# Altium PCB CAN Logger 3c HP3561 PCB.PcbDoc (part 1 of 3)
Units mil, origin at the board's own origin, x right, y up, seen from the top; angles counter-clockwise.
Board outline 2229 x 3254 mil, 4 copper layers (Component Side, Signal Layer 2, Signal Layer 1, Solder Side), stack 33.234 mil thick; 117 components, 130 nets, 581 pads, 372 vias.
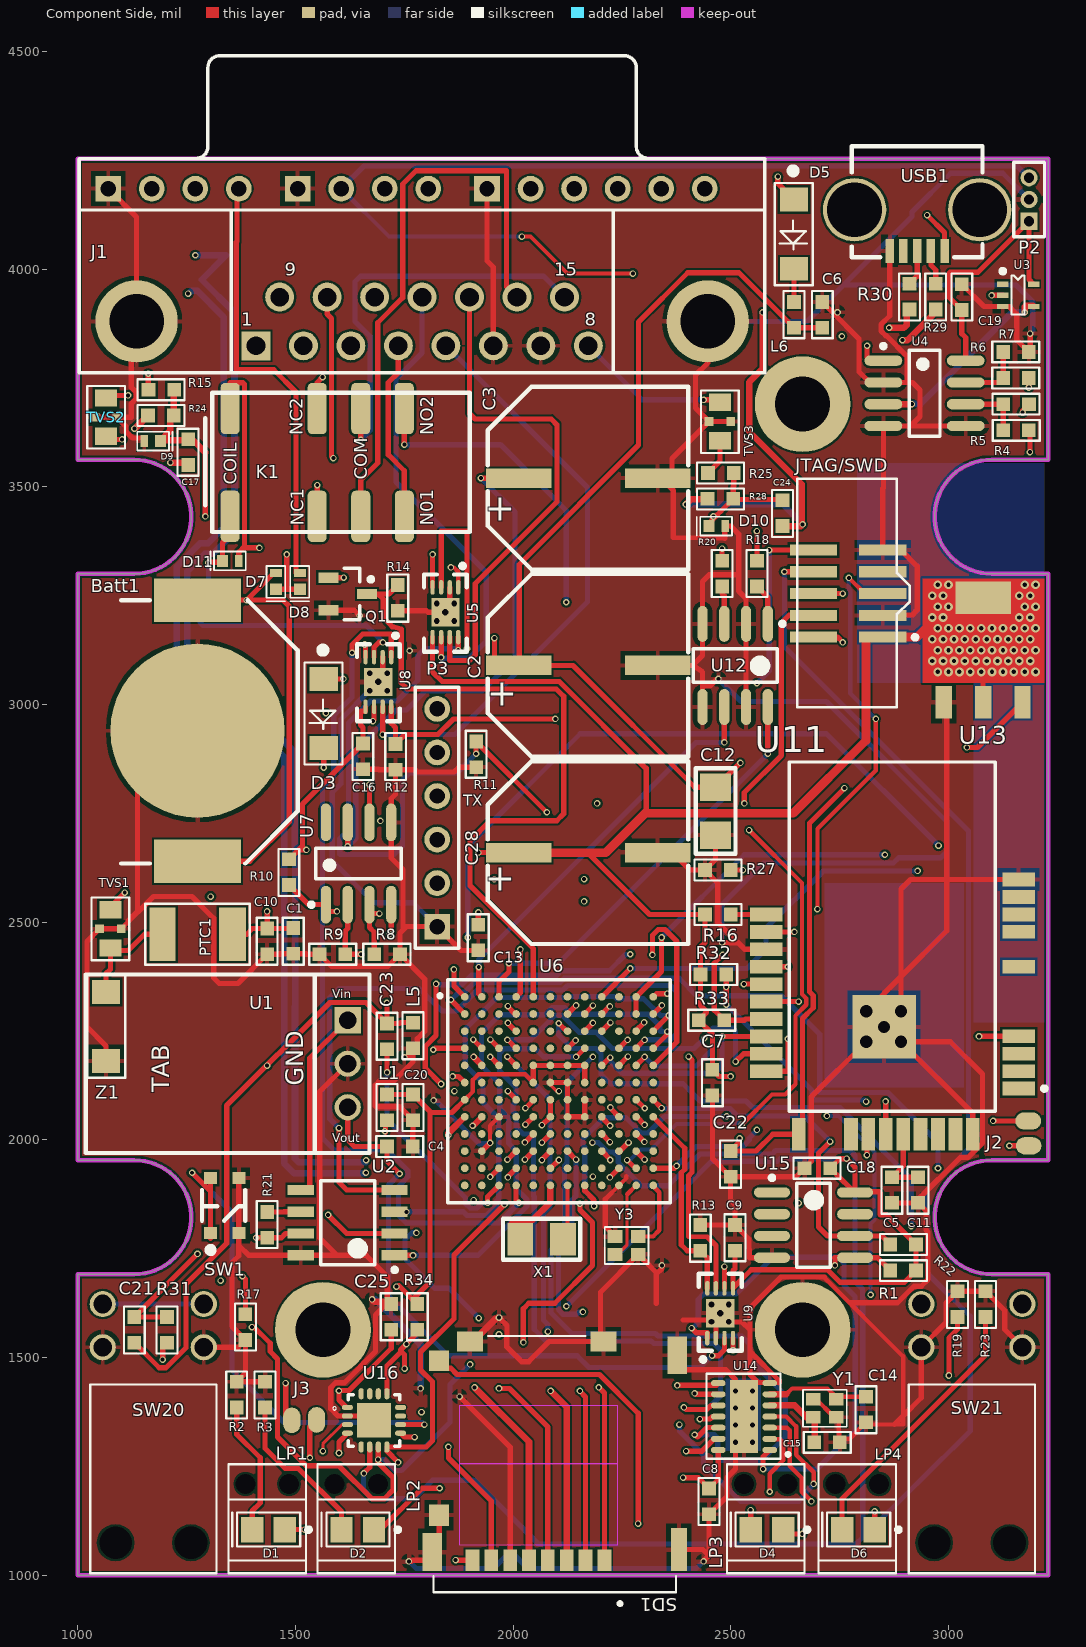
[diagram p0: Component Side view]
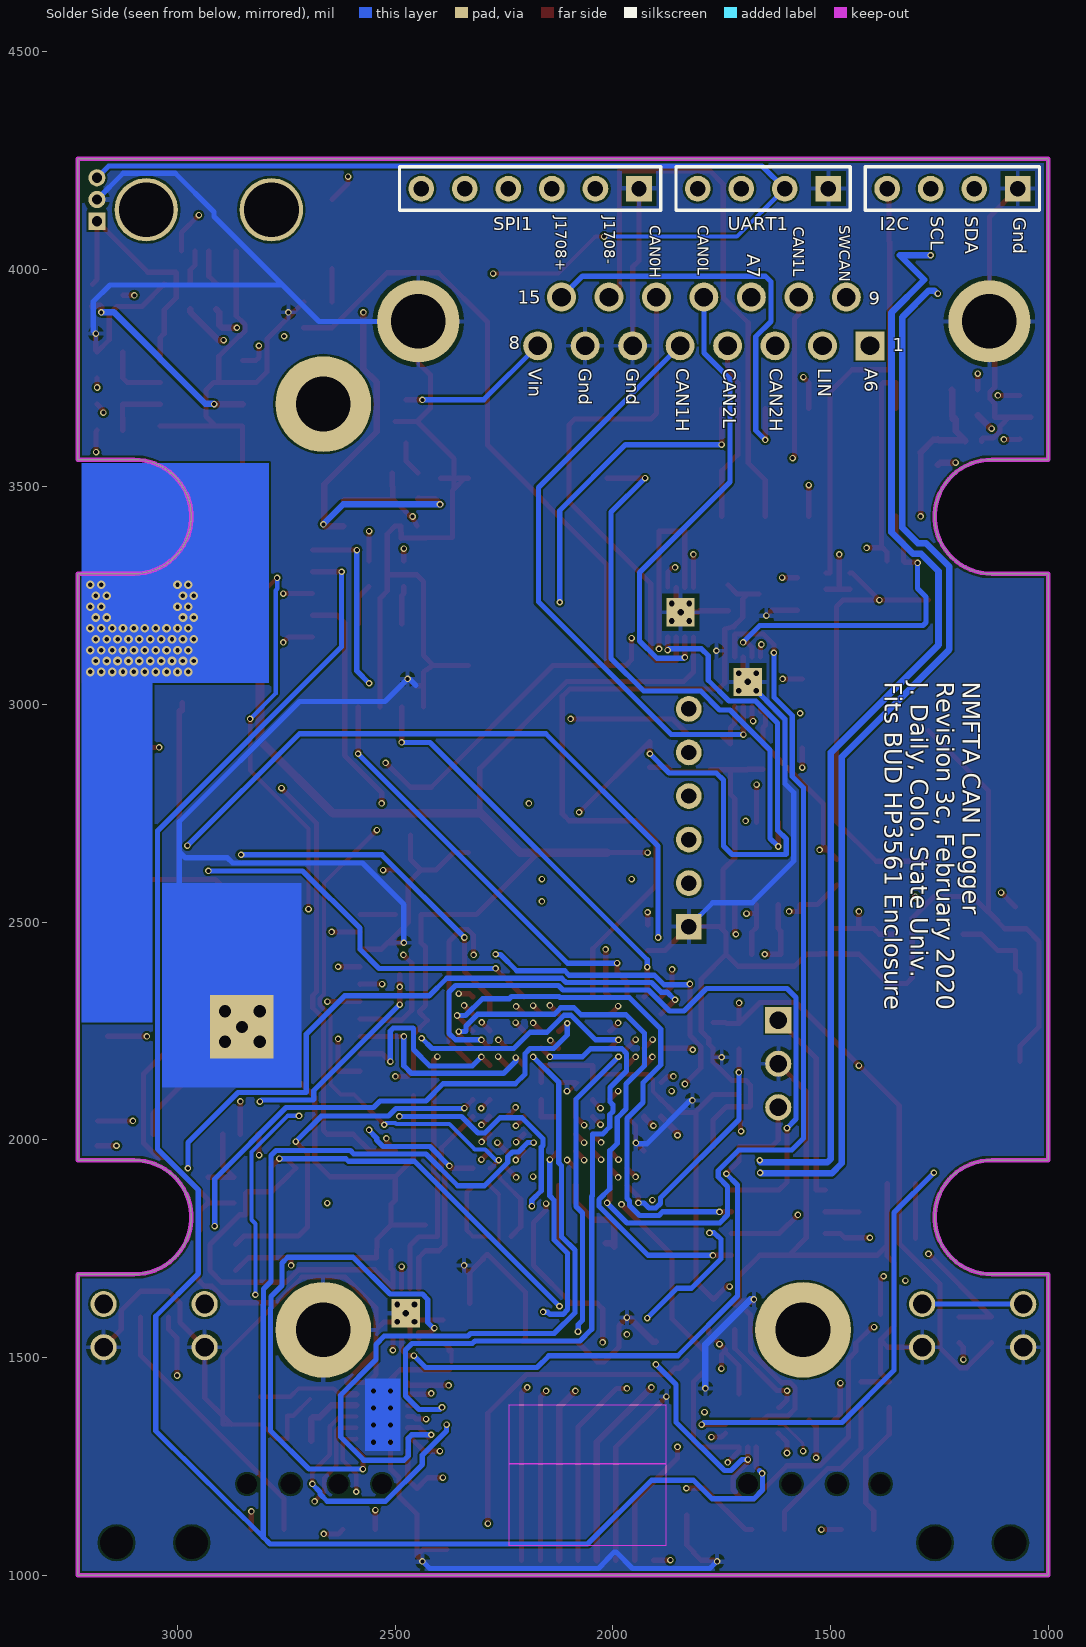
[diagram p1: Solder Side view, seen from below]
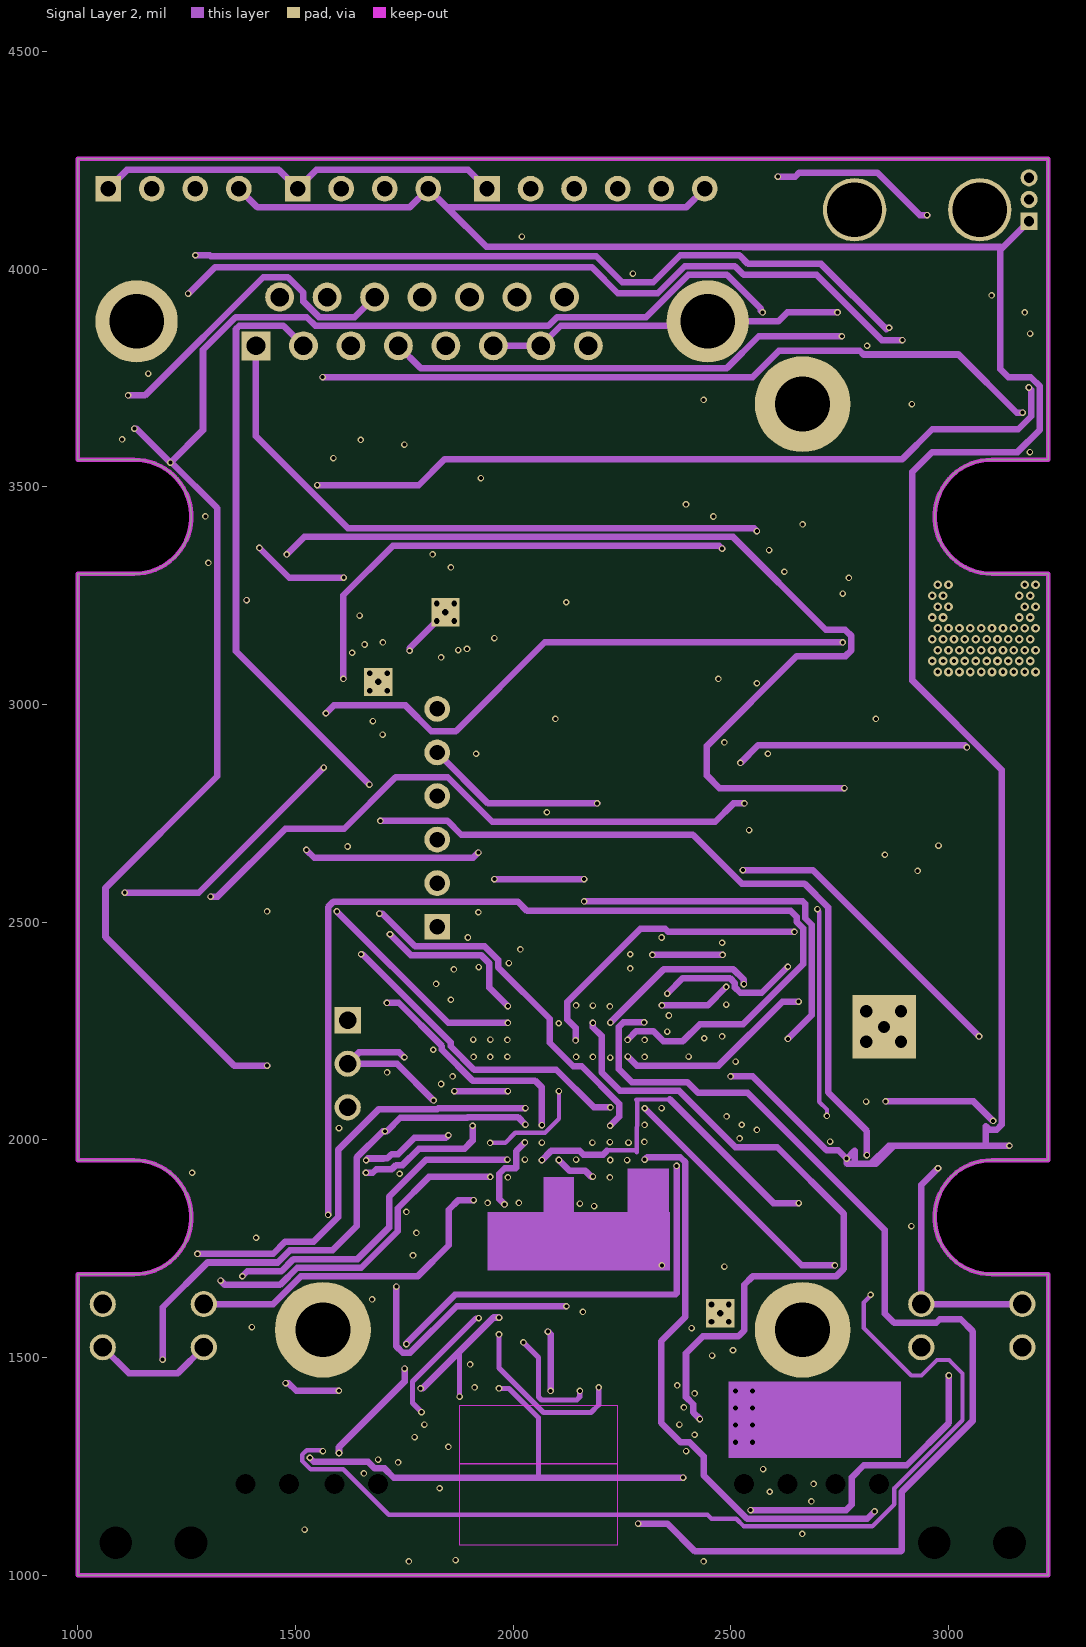
[diagram p2: Signal Layer 2]
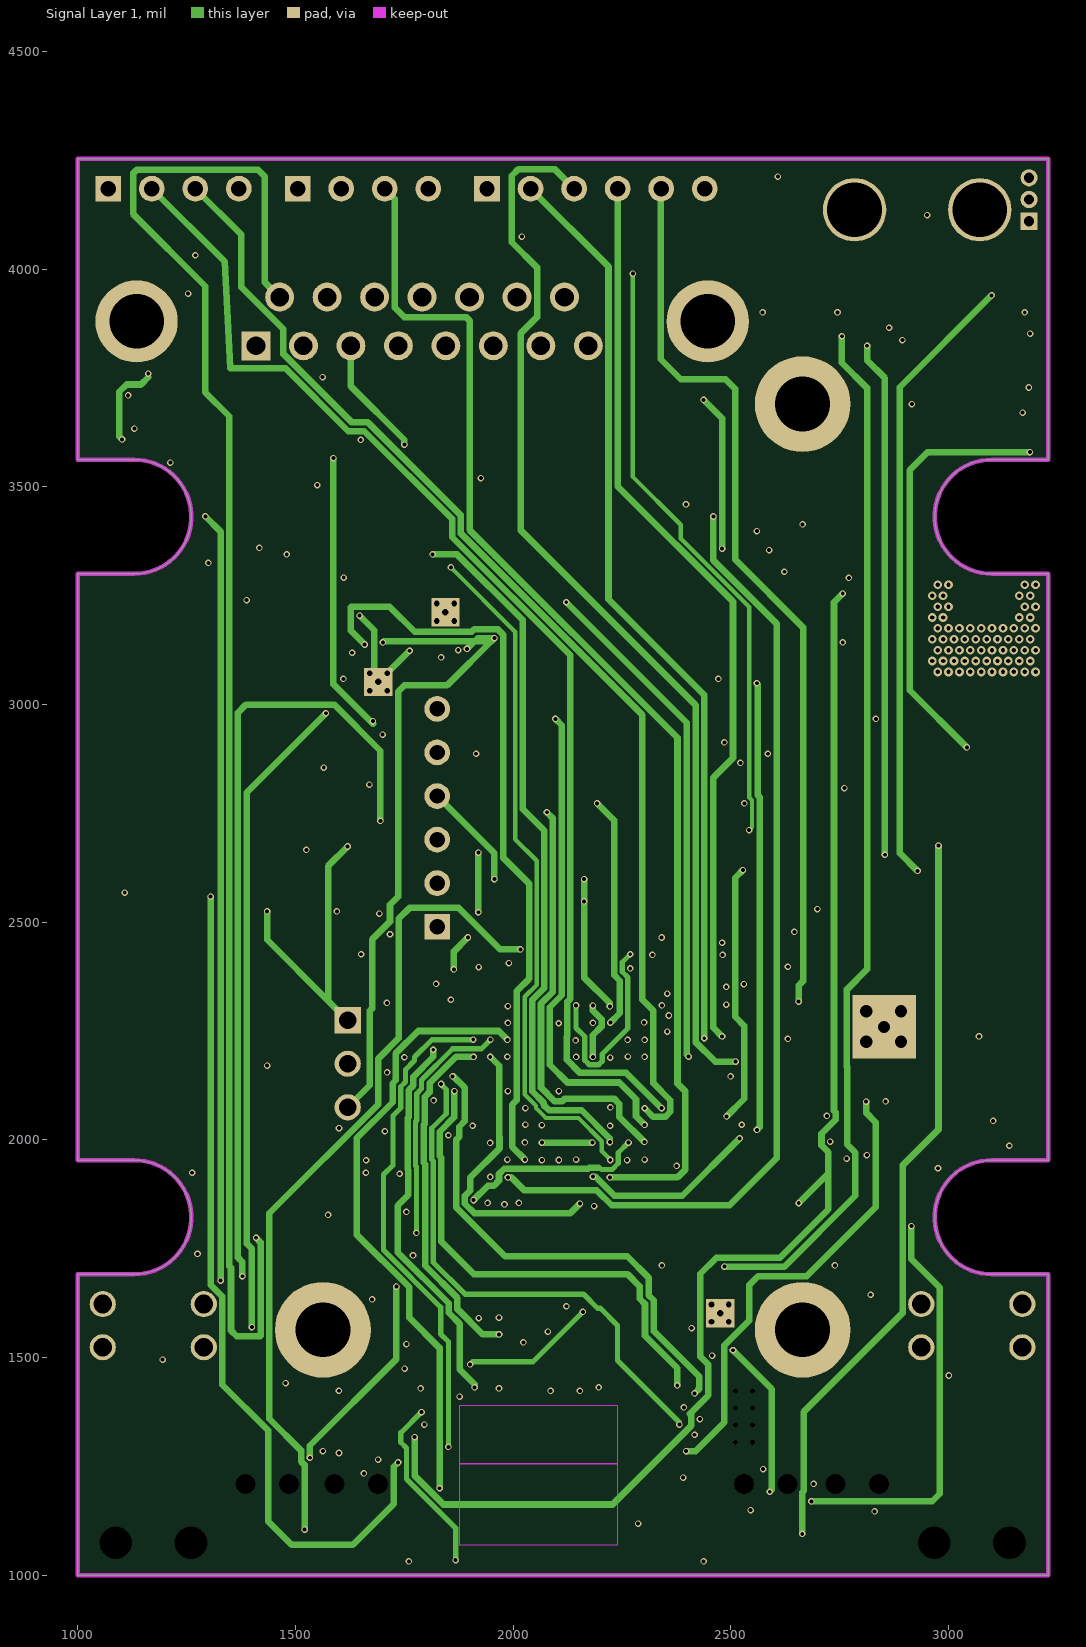
[diagram p3: Signal Layer 1]

## Layer stack, top to bottom
Top Solder: solder mask 0.4, Solder Resist, Dk 3.5
Component Side: signal copper 1.4
Dielectric 1: core 12.6, FR-4, Dk 4.8
Signal Layer 2: signal copper 1.417
Dielectric 5: prepreg 5, Dk 4.2
Signal Layer 1: signal copper 1.417
Dielectric 4: core 10, Dk 4.2
Solder Side: signal copper 1.4
Bottom Solder: solder mask 0.4, Solder Resist, Dk 3.5

## Board outline
1000,1000 1000,1691.5 1130,1691.5 ccw(c1130,1822.5) 1130,1953.5 1000,1953.5 1000,3300.5 1130,3300.5 ccw(c1130,3431.5) 1130,3562.5 1000,3562.5 1000,4254 3229,4254 3229,3562.5 3099,3562.5 ccw(c3099,3431.5) 3099,3300.5 3229,3300.5 3229,1953.5 3099,1953.5 ccw(c3099,1822.5) 3099,1691.5 3229,1691.5 3229,1000

## Design rules (kind name [scope] priority, off if disabled: settings)
Clearance [InComponent('U16')] p1: gap=3 ignorepadtopadclearanceinfootprint=TRUE
Clearance Clearance_1 [All] p2: gap=5 ignorepadtopadclearanceinfootprint=TRUE
DiffPairsRouting [All] p1: maxlimit=10 minlimit=10 mostfreqgap=10 toplayer_minwidth=15 toplayer_maxwidth=15 toplayer_prefwidth=15 midlayer1_minwidth=15 midlayer1_maxwidth=15 midlayer1_prefwidth=15 midlayer2_minwidth=15 midlayer2_maxwidth=15 midlayer2_prefwidth=15 bottomlayer_minwidth=15 bottomlayer_maxwidth=15 bottomlayer_prefwidth=15 maxuncoupledlength=500
HoleSize [All] p1: absolutevalues=TRUE maxlimit=250 minlimit=9 maxpercent=80.000 minpercent=20.000
MinimumSolderMaskSliver [All] p1: minsoldermaskwidth=1
PolygonConnect [All] p1: connectstyle=Relief reliefconductorwidth=10 reliefentries=4 polygonreliefangle="90 Angle" airgapwidth=10
RoutingVias [All] p1: holewidth=9 width=15 viastyle="Through Hole" minholewidth=9 minwidth=15 maxholewidth=28 maxwidth=50
SMDNeckDown [All] p1: percent=150.000
SilkToSilkClearance [All] p1: silktosilkclearance=1
SilkToSolderMaskClearance [IsPad] p1: minsilkscreentomaskgap=1 clearancetoexposedcopper=TRUE
SolderMaskExpansion [All] p1: expansion=4
Width Width_1 [All] p1: maxlimit=100 minlimit=7 preferedwidth=15 toplayer_prefwidth=12 midlayer1_minwidth=10 midlayer2_minwidth=10 bottomlayer_minwidth=10 bottomlayer_prefwidth=12 minimp=50.000000 maximp=50.000000 favimp=50.000000
25 further rules are at their usual default settings.

## Classes and differential pairs
component class "DIY Teensy 3.6": Batt1 C7 C13 C16 C18 C19 C20 C21 C22 C23 C25 D7 D8 J3 JTAG/SWD L1 L5 R31 R34 SD1 SW1 U6 U16 X1 Y3
component class "Teensy 3.6 with J1939 - Handheld Rev3b": C9 C10 C14 C15 C17 C24 D1 D2 D4 D6 D9 D10 I2C J1 P2 R2 R3 R8 R9 R10 R11 R12 R13 R15 R18 R19 R20 R21 R23 R24 R25 R28 R32 R33 SW20 SW21 TVS2 TVS3 U2 U5 U7 U8 U9 U12 U14 UART1 Y1
component class "Additional Circuits - Handheld - Rev 3b": C1 C2 C3 C4 C5 C6 C8 C11 C12 C28 D3 D5 D11 J2 K1 L6 LP1 LP2 LP3 LP4 P3 PTC1 Q1 R1 R4 R5 R6 R7 R14 R16 R17 R22 R27 R29 R30 SPI1 TVS1 U1 U3 U4 U11 U13 U15 USB1 Z1
differential pair "USB D": +"USB D_P" -"USB D_N"

## Components (designator, comment, footprint, x,y, rotation, side; value= is the part's Value field where it differs from the comment)
Batt1 "CR1225" "Battery Clip - CR1225" 1275,2940 r270 top locked
C1 "0.1uF" 0603 1495,2457.07 r90 top
C2 "470µF" "Elec. Cap - G" 2172.6,3090 r180 top locked
C3 "100uF" "Elec. Cap - G" 2172.6,3520 r180 top locked
C4 "0.1uF" 0603 1740,1985 r0 top
C5 "0.1uF" 0603 2870,1885 r90 top
C6 "0.1uF" 0603 2710,3895 r270 top
C7 "0.1uF" 0603 2457.6,2131.85 r90 top
C8 "0.1uF" 0603 2450,1170 r90 top
C9 "0.1uF" 0603 2509.37,1775 r270 top
C10 "2.2uF" 0603 1435,2455.93 r270 top
C11 "0.1uF" 0603 2930,1885 r90 top
C12 "22uF" 1206 2465,2755.12 r90 top
C13 "0.1uF" 0603 1920,2465 r90 top
C14 "16pF" 0603 2810.5,1380.85 r90 top
C15 "16pF" 0603 2720.85,1305.63 r180 top
C16 "2.2uF" 0603 1655,2881.15 r90 top
C17 "0.1uF" 0603 1253.5,3580 r90 top
C18 "0.1uF" 0603 2698.72,1935 r0 top
C19 "0.1uF" 0603 3030.55,3935.91 r270 top
C20 "0.1uF" 0603 1770,2075 r90 top
C21 "0.1uF" 0603 1130,1564 r90 top
C22 "0.1uF" 0603 2499.52,1945 r90 top
C23 "0.1uF" 0603 1710.47,2237.79 r270 top
C24 "0.1uF" 0603 2618.79,3439.53 r90 top
C25 "0.1uF" 0603 1720,1593.53 r270 top
C28 "470µF" "Elec. Cap - G" 2172.6,2660 r180 top locked
D1 "Green" "0805 POLARIZED" 1440,1105 r180 top
D2 "Red" "0805 POLARIZED" 1645,1105 r180 top
D3 "ACURA107-HF" "SMA with A and K" 1565,3059 r270 top
D4 "Yellow" "0805 POLARIZED" 2585,1105 r180 top
D5 "ACURA107-HF" "SMA with A and K" 2645,4160 r270 top
D6 "Blue" "0805 POLARIZED" 2795,1105 r180 top
D7 "Diode" CST2C 1455,3302.4 r180 top
D8 "Diode" CST2C 1510,3302.4 r180 top
D9 "Diode" CST2C 1152.64,3605 r270 top
D10 "Diode" CST2C 2486.93,3410 r90 top
D11 "Diode" CST2C 1370,3330 r90 top
I2C "Header 4" HDR1X4 1070,4185 r0 bottom
J1 "Vehicle Interface Cable Connector" DSUB1.385-2H15 1790.91,4254.02 r0 top locked
J2 "Solder Jumper" "Solder Jumper" 3185,2025 r90 top
J3 "Solder Jumper" "Solder Jumper" 1530,1355 r0 top
JTAG/SWD "JTAG/SWD" "JTAG 10-pin Header" 2769.53,3255 r90 top locked
K1 "EE2-5SNU" "RELAY - EE2" 1350,3680 r0 top
L1 "1k" 0603 1710.47,2075 r90 top
L5 "1k" 0603 1770,2240 r90 top
L6 "1k" 0603 2645,3895 r270 top
LP1 "SLP3" PCBComponent_1 1524,1255 r180 top locked
LP2 "SLP3" PCBComponent_1 1729,1255 r180 top locked
LP3 "SLP3" PCBComponent_1 2669,1255 r180 top locked
LP4 "SLP3" PCBComponent_1 2879,1255 r180 top locked
P2 "DNP GP-20U7 JST Header" MHDR1X3 3185,4110 r90 top
P3 "Header 6" HDR1X6 1825.47,2490 r90 top
PTC1 "PTC RESTTBLE 0.75A" 1812 1275,2472.5 r0 top
Q1 "NUD3124" SOT23_N 1620,3254.1 r0 top
R1 "4.7k" 0603 2896,1700 r180 top
R2 "330" 0603 1365,1415 r90 top
R3 "330" 0603 1430,1415 r90 top
R4 "4.7k" 0603 3155,3630 r180 top
R5 "47" 0603 3155.47,3690 r0 top
R6 "47" 0603 3155,3750 r0 top
R7 "4.7k" 0603 3155,3810 r0 top
R8 "100k" 0603 1710.47,2426.39 r0 top
R9 "100k" 0603 1585,2426.61 r180 top
R10 "4.7k" 0603 1485,2615 r90 top
R11 "100k" 0603 1915,2885.47 r270 top
R12 "100k" 0603 1730,2880 r270 top
R13 "100k" 0603 2430,1775 r90 top
R14 "100k" 0603 1735,3245 r90 top
R15 "100k" 0603 1192,3723 r0 top
R16 "100k" 0603 2470,2517.79 r180 top
R17 "100k" 0603 1385,1570 r270 top
R18 "10k" 0603 2560,3300.5 r270 top
R19 "330" 0603 3020.84,1623 r90 top
R20 "10k" 0603 2480,3300.5 r270 top
R21 "4.7k" 0603 1435,1805 r270 top
R22 "4.7k" 0603 2896,1760 r180 top
R23 "330" 0603 3085,1623 r90 top
R24 "10k" 0603 1190.85,3664 r180 top
R25 "100k" 0603 2477.07,3531.85 r0 top
R27 "100k" 0603 2470,2620 r180 top
R28 "10k" 0603 2475.93,3472.53 r180 top
R29 "47" 0603 2970.55,3937.06 r90 top
R30 "47" 0603 2910.55,3937.06 r90 top
R31 "330" 0603 1205,1564 r90 top
R32 "100k" 0603 2460,2380 r180 top
R33 "100k" 0603 2455.62,2275 r180 top
R34 "10k" 0603 1779.75,1593.53 r270 top locked
SD1 "503182-1852" *MOLEX_503182-1852_503182-1852(PRIMARY) 2095.5,1285 r180 top locked
SPI1 "Header 6" HDR1X6 1940,4185 r0 bottom
SW1 "PTS830" "Switch PTS830" 1305,1786.65 r90 top
SW20 "PB400" PB400 1057.5,1623 r270 top locked
SW21 "PB400" PB400 2937.5,1623 r270 top locked
TVS1 "Varistor 42V" TRANSFEED 1075,2535 r270 top
TVS2 "Varistor 24V" TRANSFEED 1065,3710 r270 top
TVS3 "Varistor 24V" TRANSFEED 2475,3700 r270 top
U1 "OKI-78SR" OKI-78SR 1620,2075 r90 top locked
U2 "NCV7356D1R2G" ONSC-SOIC-8-751-07_V 1620,1810 r180 top
U3 "74AHCT1G14" SOT-353 3160,3940 r270 top
U4 "SN75HVD08DR" SOIC-SN8_N 2945,3715 r0 top
U5 "MCP2558" TDFN 1844.53,3212.09 r180 top
U6 "MK66FX1M0VMD18" *BGA144C100P12X12_1300X1300X170_MK66FX1M0VMD18(Primary) 2105.32,2112.17 r0 top locked
U7 "MCP2003A-E/SN" SOIC-SN8_N 1645,2635 r90 top
U8 "MCP2558" TDFN 1690.47,3052.09 r180 top
U9 "MCP2558" TDFN 2475.47,1602.09 r0 top
U11 "ATML-ATWINC1500-MR210PA-28" ATML-ATWINC1500-MR210PA-28_V 2871,2305.47 r180 top locked
U12 "MOCD207R2M" SOIC-8 2510,3090 r270 top
U13 "NCP1117LPST33" SOT-223 2988.9,3005 r0 top
U14 "MCP2517FD" SOP14 2589.37,1287.91 r180 top
U15 "ATECC608A" SOIC-8 2689.92,1804.53 r0 top
U16 "MKL02Z32VFG4" *QFN50P300X300X65-17N 1680.47,1356.02 r0 top locked
UART1 "Header 4" HDR1X4 1505,4185 r0 bottom
USB1 "UX60SC-MB-5S8" "USB Mini UX60S" 2927.99,4282.16 r180 top
X1 "32.768 KHz" "XTAL 2-pad Small" 2114.5,1771.89 r180 top
Y1 "40MHz" "XTAL 4 pad small" 2742.49,1404.52 r180 top
Y3 "16MHz" "XTAL 4 pad small" 2234.01,1737 r0 top
Z1 "SMA6J" SMA 1065,2181 r90 top

## Footprints (in the part's own frame and the unit in brackets; to place one, negate y for a bottom-side part, rotate by r counter-clockwise, add the part's x,y. Pads: shape width x height; smd on the part's side, far side on the other; paste and mask are expansions set on the pad)
0603 [mm] "0603 SMP Component with outline"
  rect 0.8x0.8 smd: 1(-0.75,0) 2(0.75,0)
  silkscreen extent -1.39,-0.61 1.36,0.61
"0805 POLARIZED" [mm] "Polarized 0805 with Pin 1 as Anode (+)"
  rect 1.3x1.5 smd: 1(-0.899,0) 2(1.001,0)
  silkscreen extent -2.39,-0.99 2.16,0.99
1206 [mm]
  rect 1.6x1.8 smd: 1(-1.4,0) 2(1.4,0)
  silkscreen extent -2.47,-1.16 2.5,1.15
1812 [mil] "Used for PTC Fuses from belfuse"
  rect 60x122 smd: 1(-80,0)
  rect 62x122 smd: 2(80,0)
  silkscreen extent -120,-70 120,70
*BGA144C100P12X12_1300X1300X170_MK66FX1M0VMD18(Primary) [mm]
  round 0.45 smd: A1(-5.5,5.5) A2(-4.5,5.5) A3(-3.5,5.5) A4(-2.5,5.5) A5(-1.5,5.5) A6(-0.5,5.5) A7(0.5,5.5) A8(1.5,5.5) A9(2.5,5.5) A10(3.5,5.5) A11(4.5,5.5) A12(5.5,5.5) B1(-5.5,4.5) B2(-4.5,4.5) B3(-3.5,4.5) B4(-2.5,4.5) B5(-1.5,4.5) B6(-0.5,4.5) B7(0.5,4.5) B8(1.5,4.5) B9(2.5,4.5) B10(3.5,4.5) B11(4.5,4.5) B12(5.5,4.5) C1(-5.5,3.5) C2(-4.5,3.5) C3(-3.5,3.5) C4(-2.5,3.5) C5(-1.5,3.5) C6(-0.5,3.5) C7(0.5,3.5) C8(1.5,3.5) C9(2.5,3.5) C10(3.5,3.5) C11(4.5,3.5) C12(5.5,3.5) D1(-5.5,2.5) D2(-4.5,2.5) D3(-3.5,2.5) D4(-2.5,2.5) D5(-1.5,2.5) D6(-0.5,2.5) D7(0.5,2.5) D8(1.5,2.5) D9(2.5,2.5) D10(3.5,2.5) D11(4.5,2.5) D12(5.5,2.5) E1(-5.5,1.5) E2(-4.5,1.5) E3(-3.5,1.5) E4(-2.5,1.5) E5(-1.5,1.5) E6(-0.5,1.5) E7(0.5,1.5) E8(1.5,1.5) E9(2.5,1.5) E10(3.5,1.5) E11(4.5,1.5) E12(5.5,1.5) F1(-5.5,0.5) F2(-4.5,0.5) F3(-3.5,0.5) F4(-2.5,0.5) F5(-1.5,0.5) F6(-0.5,0.5) F7(0.5,0.5) F8(1.5,0.5) F9(2.5,0.5) F10(3.5,0.5) F11(4.5,0.5) F12(5.5,0.5) G1(-5.5,-0.5) G2(-4.5,-0.5) G3(-3.5,-0.5) G4(-2.5,-0.5) G5(-1.5,-0.5) G6(-0.5,-0.5) G7(0.5,-0.5) G8(1.5,-0.5) G9(2.5,-0.5) G10(3.5,-0.5) G11(4.5,-0.5) G12(5.5,-0.5) H1(-5.5,-1.5) H2(-4.5,-1.5) H3(-3.5,-1.5) H4(-2.5,-1.5) H5(-1.5,-1.5) H6(-0.5,-1.5) H7(0.5,-1.5) H8(1.5,-1.5) H9(2.5,-1.5) H10(3.5,-1.5) H11(4.5,-1.5) H12(5.5,-1.5) J1(-5.5,-2.5) J2(-4.5,-2.5) J3(-3.5,-2.5) J4(-2.5,-2.5) J5(-1.5,-2.5) J6(-0.5,-2.5) J7(0.5,-2.5) J8(1.5,-2.5) J9(2.5,-2.5) J10(3.5,-2.5) J11(4.5,-2.5) J12(5.5,-2.5) K1(-5.5,-3.5) K2(-4.5,-3.5) K3(-3.5,-3.5) K4(-2.5,-3.5) K5(-1.5,-3.5) K6(-0.5,-3.5) K7(0.5,-3.5) K8(1.5,-3.5) K9(2.5,-3.5) K10(3.5,-3.5) K11(4.5,-3.5) K12(5.5,-3.5) L1(-5.5,-4.5) L2(-4.5,-4.5) L3(-3.5,-4.5) L4(-2.5,-4.5) L5(-1.5,-4.5) L6(-0.5,-4.5) L7(0.5,-4.5) L8(1.5,-4.5) L9(2.5,-4.5) L10(3.5,-4.5) L11(4.5,-4.5) L12(5.5,-4.5) M1(-5.5,-5.5) M2(-4.5,-5.5) M3(-3.5,-5.5) M4(-2.5,-5.5) M5(-1.5,-5.5) M6(-0.5,-5.5) M7(0.5,-5.5) M8(1.5,-5.5) M9(2.5,-5.5) M10(3.5,-5.5) M11(4.5,-5.5) M12(5.5,-5.5)
  silkscreen extent -7.05,-6.5 6.5,6.5
*MOLEX_503182-1852_503182-1852(PRIMARY) [mm]
  rect 0.8x1.24 smd: 1(-2.9,6.355) 2(-1.8,6.355) 3(-0.7,6.355) 4(0.4,6.355) 5(1.5,6.355) 6(2.6,6.355) 7(3.7,6.355) 8(4.8,6.355)
  rect 1.16x1.2 smd: DT(6.74,-5.275)
  rect 0.95x2.5 smd: P1(-7.245,5.725)
  rect 1.15x2.2 smd: P2(7.145,5.875) P3(-7.145,-5.605)
  rect 1.5x1.15 smd: P4(-2.84,-6.4) P5(4.94,-6.4)
  rect 1.16x1.25 smd: SW(6.74,3.725)
  Keep-Out Layer region: -3.655,5.485 5.55,5.485 5.55,0.726 -3.655,0.726
  Keep-Out Layer region: -3.659,0.725 5.55,0.725 5.55,-2.682 -3.659,-2.682
  silkscreen extent -7.07,-6.72 7.07,8.99
*QFN50P300X300X65-17N [mm]
  oval 0.65x0.3 smd: 1(-1.55,0.75) 2(-1.55,0.25) 3(-1.55,-0.25) 4(-1.55,-0.75) 9(1.55,-0.75) 10(1.55,-0.25) 11(1.55,0.25) 12(1.55,0.75)
  oval 0.3x0.65 smd: 5(-0.75,-1.55) 6(-0.25,-1.55) 7(0.25,-1.55) 8(0.75,-1.55) 13(0.75,1.55) 14(0.25,1.55) 15(-0.25,1.55) 16(-0.75,1.55)
  rect 2x2 smd: 17(0,0)
  silkscreen extent -2.4,-1.5 1.5,1.5
ATML-ATWINC1500-MR210PA-28_V [mm] "Module, 28-Leads, Body 21.72x14.73mm, Pitch 1.016mm"
  rect 1.9x0.8 smd: 1(-7.365,4.761) 2(-7.365,3.745) 3(-7.365,2.729) 4(-7.365,1.713) 5(-7.365,-2.351) 6(-7.365,-4.383) 7(-7.365,-5.399) 8(-7.365,-6.415) 9(-7.365,-7.431) 10(7.365,-5.393) 11(7.365,-4.377) 12(7.365,-3.361) 13(7.365,-2.345) 14(7.365,-1.329) 15(7.365,-0.313) 16(7.365,0.703) 17(7.365,1.719) 18(7.365,2.735) 19(7.365,3.751)
  rect 0.8x1.9 smd: 20(5.465,7.431) 21(2.417,7.431) 22(1.401,7.431) 23(0.385,7.431) 24(-0.631,7.431) 25(-1.647,7.431) 26(-2.663,7.431) 27(-3.679,7.431) 28(-4.695,7.431)
  rect 3.7x3.7 hole 0.711: 29(0.485,1.161)
  silkscreen extent -8.99,-14.29 6.01,6.08, body extent -7.36,-14.29 7.36,7.43, height 3.35
"Battery Clip - CR1225" [mil] "Battery Holder Outlline for CR2032"
  rect 100x200 smd: 1(-300,0) 1(300,0)
  round 400 smd: 2(0,0)
  silkscreen extent -300,-175 305,230
CST2C [mm] "Toshiba 0603 diode"
  rect 0.7x0.45 smd: 1(0,0)
  rect 0.7x0.65 smd: 2(0,0.95)
  silkscreen extent -0.55,-0.4 0.55,1.65
DSUB1.385-2H15 [mm] "Connector; D Subminiature; 15 Position; Right Angle; Pitch 1.385 mm"
  rect 1.69x1.69 hole 1.09: 1(-9.695,-10.92)
  round 1.69 hole 1.09: 2(-6.925,-10.92) 3(-4.155,-10.92) 4(-1.385,-10.92) 5(1.385,-10.92) 6(4.155,-10.92) 7(6.925,-10.92) 8(9.695,-10.92) 9(-8.31,-8.08) 10(-5.54,-8.08) 11(-2.77,-8.08) 12(0,-8.08) 13(2.77,-8.08) 14(5.54,-8.08) 15(8.31,-8.08)
  round 4.8 hole 3.18: 16(-16.66,-9.5) 17(16.66,-9.5)
  silkscreen extent -20,-12.5 20,6
"Elec. Cap - G" [mil] "Panasonic Style Electrolytic capacitor, Can size G, 10mm diameter"
  rect 150x45 smd: 1(159.45,0) 2(-159.45,0)
  silkscreen extent -229,-210 231,210
HDR1X4 [mm] "Connector; Header; 4 Position"
  rect 1.5x1.5 hole 0.9: 1(0,0)
  round 1.5 hole 0.9: 2(2.54,0) 3(5.08,0) 4(7.62,0)
  silkscreen extent -1.27,-1.27 8.89,1.27
HDR1X6 [mm] "Connector; Header; 6 Position"
  rect 1.5x1.5 hole 0.9: 1(0,0)
  round 1.5 hole 0.9: 2(2.54,0) 3(5.08,0) 4(7.62,0) 5(10.16,0) 6(12.7,0)
  silkscreen extent -1.27,-1.27 13.97,1.27
"JTAG 10-pin Header" [mm] "1.27mm pitch Box Header SMT Type"
  rect 0.65x2.76 smd: 1(-2.54,-2.02) 2(-2.54,2.02) 3(-1.27,-2.02) 4(-1.27,2.02) 5(0,-2.02) 6(0,2.02) 7(1.27,-2.02) 8(1.27,2.02) 9(2.54,-2.02) 10(2.54,2.02)
  silkscreen extent -6.64,-4.03 6.71,2.97
MHDR1X3 [mm] "Connector; Header; 3 Position"
  rect 1x1 hole 0.6: 1(0,0)
  round 1 hole 0.6: 2(1.27,0) 3(2.54,0)
  silkscreen extent -0.9,-0.9 3.44,0.9
OKI-78SR [mil] "Horizontal Mount SIP DC/DC Converter"
  rect 60x60 hole 40: 1(200,0)
  round 60 hole 40: 2(100,0) 3(0,0)
  silkscreen extent -105,-50 305,602
ONSC-SOIC-8-751-07_V [mm] "SOIC, 8-Leads, Body 4.9x3.9mm, Pitch 1.27mm"
  rect 1.52x0.6 smd: 1(-2.74,1.905) 2(-2.74,0.635) 3(-2.74,-0.635) 4(-2.74,-1.905) 5(2.74,-1.905) 6(2.74,-0.635) 7(2.74,0.635) 8(2.74,1.905)
  silkscreen extent -2.87,-2.45 1.58,2.88, body extent -1.95,-2.45 1.95,2.45, height 1.75
PB400 [mil]
  round 60 hole 43: 1(0,0) 2(99,0) 3(0,232) 4(99,232)
  round 0 hole 75: ""(548,29.5) ""(548,202.5)
  silkscreen extent 185,-29 618,261
PCBComponent_1 [mil]
  round 0 hole 46: ""(39,45) ""(139,45)
  silkscreen extent 0,0 178,250
"RELAY - EE2" [mm] "EE2 Relay"
  rrect50% 1.11x3 smd: 1(7.62,0) 2(5.08,0) 3(10.16,0) 4(7.62,-6.29) 5(5.08,-6.29) 6(10.16,-6.29) 7(0,-6.29) 8(0,0)
  silkscreen extent -1.45,-7.2 13.98,0.92
SMA [mil] "SMA with outline"
  rect 55x65 smd: 1(0,0) 2(159,0)
  silkscreen extent -38,-44 197,43
"SMA with A and K" [mil] "SMA with outline and Cathode Bar on Pin 2"
  rect 55x65 smd: 1(0,0) 2(159,0)
  silkscreen extent -71,-44 197,43
SOIC-8 [mm]
  oval 2.1x0.6 smd: 1(-2.425,1.905) 2(-2.425,0.635) 3(-2.425,-0.635) 4(-2.425,-1.905) 5(2.425,-1.905) 6(2.425,-0.635) 7(2.425,0.635) 8(2.425,1.905)
  silkscreen extent -2.55,-2.45 0.98,2.88
SOIC-SN8_N [mm] "SOIC, 8-Leads, Body 4.9x3.8mm, Pitch 1.27mm, IPC Medium Density"
  oval 2.2x0.6 smd: 1(-2.4,1.905) 2(-2.4,0.635) 3(-2.4,-0.635) 4(-2.4,-1.905) 5(2.4,-1.905) 6(2.4,-0.635) 7(2.4,0.635) 8(2.4,1.905)
  silkscreen extent -2.52,-2.5 0.9,2.88, body extent -2,-2.5 2,2.5, height 1.75
"Solder Jumper" [mm]
  rrect100% 1x1.5 smd: 1(-0.974,0.025) 2(0.475,0.05)
SOP14 [mm]
  oval 0.85x0.35 smd: 1(0,0) 2(0,-0.65) 3(0,-1.3) 4(0,-1.95) 5(0,-2.6) 6(0,-3.25) 7(0,-3.9) 8(3,-3.9) 9(3,-3.25) 10(3,-2.6) 11(3,-1.95) 12(3,-1.3) 13(3,-0.65) 14(3,0)
  round 0 hole 0.3: ""(1,-1.45) ""(1,-3.45) ""(1,-2.45) ""(1,-0.45) ""(2,-1.45) ""(2,-3.45) ""(2,-2.45)
  rect 1.65x4.25 smd: ""(1.5,-1.95)
  round 0.3 hole 0.3: ""(2,-0.45)
  silkscreen extent -1.14,-4.44 3.68,0.51
SOT23_N [mm] "SOT23, 3-Leads, Body 2.9x1.3mm, Pitch 0.95mm, Lead Span 2.3mm - Reverse Pinning, IPC Medium Density"
  rect 1.15x0.6 smd: 1(1.125,0) 2(-1.125,-0.95) 3(-1.125,0.95)
  silkscreen extent -0.2,-1.5 1.48,1.5, body extent -0.7,-1.5 0.7,1.5, height 1.1
SOT-223 [mm]
  rect 0.95x1.9 smd: 1(0,0) 2(2.3,0) 3(4.6,0)
  rect 3.25x1.9 smd: 4(2.3,6.1)
SOT-353 [mil]
  rect 12x26 smd: 1(-25.59,-35.43) 2(0,-35.43) 3(25.59,-35.43) 4(25.59,35.43) 6(-25.59,35.43)
  silkscreen extent -61,-40 44,15
"Switch PTS830" [mm] "Microminiature SMT Top Actuated C&K PTS830"
  rect 0.7x0.75 smd: 1(0,0) 2(3.2,0) 3(0,-1.65) 4(3.2,-1.65)
  silkscreen extent -1.1,-2.02 2.5,0.5
TDFN [mm] "8-Lead Plastic Dual Flat, No Lead Package (MN) – 2x3x0.75mm Body [TDFN]"
  rect 1.651x1.651 hole 0.381: 0(0,0)
  oval 0.25x0.85 smd: 1(-0.75,-1.45) 2(-0.25,-1.45) 3(0.25,-1.45) 4(0.75,-1.45) 5(0.75,1.45) 6(0.25,1.45) 7(-0.25,1.45) 8(-0.75,1.45)
  silkscreen extent -1.25,-2.83 1.25,2.3
TRANSFEED [mil] "AVX Multilayer Ceramic Transient Voltage Suppressors"
  rect 40x50 smd: 1(5.91,0) 2(94.09,0)
  rect 20x20 smd: 3(50,25) 3(50,-25)
  silkscreen extent -22,-43 122,43
"USB Mini UX60S" [mm] "Receptacle - Standard - Shell through Hole"
  round 3.7 hole 3.2: 0(-3.65,3.7) 0(3.65,3.7)
  rect 0.5x1.4 smd: 1(-1.6,6.1) 2(-0.8,6.1) 3(0,6.1) 4(1.6,6.1) 5(0.8,6.1)
  silkscreen extent -3.81,0 3.81,6.48
"XTAL 2-pad Small" [mm] "ECX-.327-CDX-1293SMD CRYSTAL"
  rect 1.5x1.9 smd: 1(0,0) 2(2.5,0)
  silkscreen extent -1,-1.2 3.5,1.2
"XTAL 4 pad small" [mm] "16MHz ±10ppm Crystal 8pF 100 Ohms 4-SMD, No Lead  ECS ECS-160-8-37-CWY-TR"
  rect 0.85x0.75 smd: 1(0,0) 2(1.35,0) 3(1.35,1.05) 4(0,1.05)
  silkscreen extent -0.6,-0.55 1.95,1.6

## Part data
Batt1: library part "CR2032 Battery Holder", "Lithium Battery Non-Rechargeable (Primary) 3V Coin, 12.5mm", Manufacturer=Linx, PartNumber=BAT-HLD-012-SMT, Supplier Part Number 1=BAT-HLD-012-SMT-ND, Supplier 1=Digi-Key
C1 C4 C5 C6 C7 C8 C9 C11 C13 C17 C18 C19 C20 C21 C22 C23 C24 C25: library part Cap, "CAP CER 0.1UF 50V X7R 0603", Manufacturer=KEMET, PartNumber=C0603C104K5RACAUTO, Supplier Part Number 1=399-6856-1-ND, Alternative=Acceptable, Supplier 1=Digi-Key
C2 C28: library part "Tantalum Cap_1", "470µF 16V Aluminum Electrolytic Capacitors Radial, Can - SMD  5000 Hrs @ 105°C", Manufacturer="Panasonic Electronic Components", PartNumber=EEE-HC1C471P, Supplier Part Number 1=PCE3751CT-ND, Supplier 1=Digi-Key
C3: library part "Tantalum Cap_1", "Aluminum Electrolytic Capacitors Radial, Can - SMD 5000 Hrs @ 105°C", Manufacturer="Panasonic Electronic Components", PartNumber=EEE-HC1H101P, Supplier Part Number 1=P19732CT-ND, Supplier 1=Digi-Key
C10 C16: library part Cap, "2.2µF ±10% 6.3V Ceramic Capacitor X5R 0603 (1608 Metric)", Manufacturer="Taiyo Yuden", PartNumber=JMK107BJ225KAHT, Supplier Part Number 1=587-3386-1-ND, Alternative=Acceptable, Supplier 1=Digi-Key
C12: library part Cap, "22µF ±20% 25V Ceramic Capacitor X5R 1206 (3216 Metric)", Manufacturer="Murata Electronics North America", PartNumber=GRT31CR61E226ME01L, Supplier Part Number 1=490-12451-1-ND, Supplier 1=Digi-Key
C14 C15: library part Cap, "16pF ±5% 50V Ceramic Capacitor C0G, NP0 0603 (1608 Metric)", Manufacturer=Yageo, PartNumber=CC0603JRNPO9BN160, Supplier Part Number 1=311-3964-1-ND, Alternative=Acceptable, Supplier 1=Digi-Key
D1: library part "LED - SMD", "Green 570nm LED Indication - Discrete 2.2V 0805 (2012 Metric)", Manufacturer="OSRAM Opto Semiconductors Inc.", PartNumber="LG R971-KN-1", Supplier Part Number 1=475-1410-1-ND, Supplier 1=Digi-Key
D2: library part "LED - SMD", "Red 633nm LED Indication - Discrete 2V 0805 (2012 Metric)", Manufacturer="OSRAM Opto Semiconductors Inc.", PartNumber="LS R976-NR-1", Supplier Part Number 1=475-1278-1-ND, Supplier 1=Digi-Key
D3 D5: library part "Schottky Diode", "Diode Schottky 1000V 1A Surface Mount DO-214AC (SMA)", Manufacturer="Comchip Technology", Supplier Part Number 1=641-1884-1-ND, PartNumber=ACURA107-HF, Supplier 1=Digi-Key
D4: library part "LED - SMD", "LED YELLOW DIFFUSED 0805 SMD", Manufacturer="OSRAM Opto Semiconductors Inc.", PartNumber="LY R976-PS-36", Supplier Part Number 1=475-2560-1-ND, Supplier 1=Digi-Key
D6: library part "LED - SMD", "Blue 470nm LED Indication - Discrete 3.3V 0805 (2012 Metric)", Manufacturer="Broadcom Limited", PartNumber=HSMN-C170, Supplier Part Number 1=516-1437-1-ND, Supplier 1=Digi-Key
D7 D8 D9 D10 D11: "Default Diode", Manufacturer="Toshiba Semiconductor and Storage", PartNumber=CCS15S30L3FCT-ND, Supplier 1=Digi-Key, Supplier Part Number 1=CCS15S30L3FCT-ND
I2C UART1: "Header, 4-Pin"
J1: library part "D Connector 15", "Receptacle Assembly, 15 Position, Right Angle", Manufacturer="Amphenol FCI", PartNumber=D15S33E4GV00LF, Supplier Part Number 1=609-1498-ND, Supplier 1=Digi-Key
JTAG/SWD: library part "JTAG Cortex", "Connector Header Surface Mount 10 position 0.050\" (1.27mm)", Manufacturer="CNC Tech", PartNumber=3221-10-0300-00, Supplier Part Number 1=1175-1735-ND, Supplier 1=Digi-Key
K1: library part "DPDT Relay", "General Purpose Relay DPDT (2 Form C) Surface Mount", Manufacturer=KEMET, Supplier Part Number 1=399-11057-5-ND, PartNumber=EE2-5SNU, Supplier 1=Digi-Key
L1 L5 L6: library part "Ferrite Bead", "Ferrite Beads Multi-Layer Power 1KOhm 25% 100MHz 1A 200mOhm DCR 0603 Automotive T/R", Manufacturer=Murata, PartNumber=BLM18KG102SZ1D, Supplier Part Number 1=490-17350-1-ND, Alternative=Acceptable, Supplier 1=Digi-Key
LP1 LP2 LP3 LP4: "Light Pipe Single Clear Rigid Round with Domed Top, 3mm Board Mount, Press Fit, Right Angle", Manufacturer="Bivar Inc.", PartNumber=SLP3-150-250-R, Supplier Part Number 1=492-2517-ND, Supplier 1=Digi-Key
P2: library part MHDR1X3, "CONN HEADER PH SIDE 3POS 2MM SMD", Manufacturer=JST, PartNumber=S3B-PH-SM4-TB(LF)(SN), Supplier Part Number 1=455-1750-1-ND, Supplier 1=Digi-Key
P3 SPI1: "Header, 6-Pin"
PTC1: library part PTC, "PTC RESTTBLE 0.75A 33V CHIP 1812", Manufacturer="Bel Fuse Inc.", PartNumber=0ZCG0075BF2B, Supplier Part Number 1=507-1765-1-ND, Supplier 1=Digi-Key
Q1: library part IRLML6344TRPbF, "IC INDCT LOAD DRVR AUTO SOT23", Manufacturer="ON Semiconductor", PartNumber=NUD3124LT1G, Supplier Part Number 1=NUD3124LT1GOSCT-ND, Alternative=None, Supplier 1=Digi-Key
R1 R4 R7 R10 R21 R22: library part "Chip Resistor", "4.7 kOhms ±1% 0.1W, 1/10W Chip Resistor 0603 (1608 Metric) Automotive AEC-Q200, High Voltage Thick Film", Manufacturer="Rohm Semiconductor", PartNumber=KTR03EZPF4701, Supplier Part Number 1=RHM4.7KAYCT-ND, Alternative=Acceptable, Supplier 1=Digi-Key
R2 R3 R19 R23 R31: library part "Chip Resistor", "330 Ohms ±1% 0.1W, 1/10W Chip Resistor 0603 (1608 Metric) Automotive AEC-Q200, High Voltage Thick Film", Manufacturer="Rohm Semiconductor", PartNumber=KTR03EZPF3300, Supplier Part Number 1=RHM330AYCT-ND, Alternative=Acceptable, Supplier 1=Digi-Key
R5 R6 R29 R30: library part "Chip Resistor", "±1% 0.1W, 1/10W Chip Resistor 0603 (1608 Metric) Automotive AEC-Q200, High Voltage Thick Film", Manufacturer="Rohm Semiconductor", PartNumber=KTR03EZPF47R0, Supplier Part Number 1=RHM47AYCT-ND, Supplier 1=Digi-Key
R8 R9 R11 R12 R13 R14 R15 R16 R17 R25 R27 R32 R33: library part "Chip Resistor", "100 kOhms ±1% 0.1W, 1/10W Chip Resistor 0603 (1608 Metric) Automotive AEC-Q200, High Voltage Thick Film", Manufacturer="Rohm Semiconductor", PartNumber=KTR03EZPF1003, Supplier Part Number 1=RHM100KAYCT-ND, Alternative=Acceptable, Supplier 1=Digi-Key
R18 R20 R24 R28 R34: library part "Chip Resistor", "10 kOhms ±1% 0.1W, 1/10W Chip Resistor 0603 (1608 Metric) Automotive AEC-Q200, High Voltage Thick Film", Manufacturer="Rohm Semiconductor", PartNumber=KTR03EZPF1002, Supplier Part Number 1=RHM10.0KAYCT-ND, Alternative=Acceptable, Supplier 1=Digi-Key
SD1: "MICRO SD NORMAL ULTRALOWPRO8CKTE", Manufacturer=Molex, PartNumber=5031821852, Supplier Part Number 1=WM12834CT-ND, Supplier 1=Digi-Key
SW1: library part "Switch - Tactile_2", "Tactile Switch SPST-NO Top Actuated Surface Mount", Manufacturer="C & K Components", PartNumber="PTS830GM140 SMTR LFS", Supplier Part Number 1=CKN10587CT-ND, Supplier 1=Digi-Key
SW20 SW21: "Pushbutton Switch DPST-NO Standard Through Hole, Right Angle", Manufacturer=E-Switch, PartNumber=PB400OAQR1BLK, Supplier Part Number 1=EG5548-ND, Supplier 1=Digi-Key
TVS1: library part Transfeed, "VARISTOR CAP FEEDTHRU 18V 0805", Manufacturer=AVX, PartNumber=V2F118A400Y2EDP, Supplier Part Number 1=478-2485-1-ND, Supplier 1=Digi-Key
TVS2 TVS3: library part Transfeed, "VARISTOR CAP FEEDTHRU 14V 0805", Manufacturer=AVX, PartNumber=V2F114C300Y1FDP, Supplier Part Number 1=478-2484-1-ND, Supplier 1=Digi-Key
U1: library part 7805, "5V DC/DC Converter (7805 replacement)", Manufacturer="Murata Power Solutions Inc.", PartNumber=OKI-78SR-5/1.5-W36H-C, Supplier Part Number 1=811-2692-ND, Supplier 1=Digi-Key
U2: library part NCV7356D1G, "Single Wire CAN Transceiver, 5 to 27 V, 8-Pin SOIC, Pb-Free, Tube", Manufacturer="On Semiconductor", Supplier Part Number 1=NCV7356D1R2GOSCT-ND, PartNumber=NCV7356D1R2G, Supplier 1=Digi-Key
U3: library part "74AHCT1G14 Inverter", "IC SCHMIT-TRIGG INV GATE SOT353", Manufacturer="Diodes Incorporated", PartNumber=74AHCT1G14SE-7, Supplier Part Number 1=74AHCT1G14SE-7DICT-ND, Supplier 1=Digi-Key
U4: library part "SN75HVD12D (3.3v RS485)", "IC RS485 TXRX 3/5V 8-SOIC", Manufacturer="Texas Instruments", Supplier Part Number 1=296-37893-1-ND, PartNumber=SN75HVD08DR, Supplier 1=Digi-Key
U5: library part MCP2558FD, "Microchip CAN FD Transceiver with Silent Mode", Manufacturer="Microchip Technology", PartNumber=MCP2558FDT-H/MNY, Supplier Part Number 1=MCP2558FDT-H/MNYCT-ND, Supplier 1=Digi-Key
U6: "Kinetis K66: 180MHz Cortex-M4F MCU, 1.2MB Flash, 256KB SRAM, 2xUSB, Ethernet, 144-MAPBGA", Manufacturer="NXP USA Inc.", Supplier Part Number 1=568-13335-ND, PartNumber=MK66FX1M0VMD18, Supplier 1=Digi-Key
U7: library part MCP2003AT-E/SN, "LIN J2602 Transceiver, 8-Pin SOIC, Extended Temperature, Tape and Reel", Manufacturer="Microchip Technology", Supplier Part Number 1=MCP2003A-E/SN-ND, PartNumber=MCP2003A-E/SN, Supplier 1=Digi-Key
U8 U9: library part MCP2558FD, "Microchip CAN FD Transceiver with Silent Mode", Manufacturer=Microchip, PartNumber=MCP2558FDT-H/MNY, Supplier Part Number 1=MCP2558FDT-H/MNYCT-ND, Supplier 1=Digi-Key
U11: "SMARTCONNECT ATWINC1500B-MU-T MO", Manufacturer="Microchip Technologies", PartNumber=ATWINC1510-MR210PB1140, Supplier Part Number 1=ATWINC1510-MR210PB1140-ND, Supplier 1=Digi-Key
U12: library part "Optoisolator - Dual", "Optoisolator Transistor Output 2500Vrms 2 Channel 8-SO Tall", Manufacturer="Fairchild/ON Semiconductor", Supplier Part Number 1=MOCD207R2MCT-ND, PartNumber=MOCD207R2M, Supplier 1=Digi-Key
U13: library part "NCP1117 2.5V", "Linear Voltage Regulator IC Positive Fixed Output 3.3V 1A SOT-223", Manufacturer="On Semiconductor", PartNumber=NCP1117LPST33T3G, Supplier Part Number 1=NCP1117LPST33T3GOSCT-ND, Supplier 1=Digi-Key
U14: "CANbus Controller CAN 2.0 SPI Interface 14-VDFN (4.5x3)", Manufacturer="Microchip Technology", PartNumber=MCP2517FDT-H/JHA, Supplier Part Number 1=MCP2517FDT-H/JHACT-ND, Supplier 1=Digi-Key
U15: library part ATECC508A, "Authentication Chip IC Networking and Communications 8-SOIC", Manufacturer="Microchip Technology", PartNumber=ATECC608A-SSHDA-T, Supplier Part Number 1=ATECC608A-SSHDA-TCT-ND, Supplier 1=Digi-Key
U16: "32 Bit Microcontroller, Kinetis L Series Ultra Low Power, ARM Cortex-M0+, 48 MHz, 32 KB, 4 KB, 16", Manufacturer=PJRC, PartNumber="Pre Programmed MKL02Z32VFG4", Supplier Part Number 1=IC_MKL02Z32_QFN16, Alternative="Sole Source", Supplier 1=PJRC
USB1: library part USB-Rugged, "USB - mini B USB 2.0 Receptacle Connector 5 Position Surface Mount, Right Angle; Through Hole", Manufacturer=Hirose, Supplier Part Number 1=H11589CT-ND, PartNumber=UX60SC-MB-5S8, Supplier 1=Digi-Key
X1: library part "Crystal Oscillator", "Canned Oscillator", Manufacturer="ECS Inc.", PartNumber=ECX-.327-CDX-1293, Supplier Part Number 1=XC2292CT-ND, Supplier 1=Digi-Key
Y1: library part "Crystal with Ground", "40MHz ±10ppm Crystal 10pF 40 Ohms 4-SMD, No Lead", Manufacturer="ECS Inc.", PartNumber=ECS-400-10-37B-CKY-TR, Supplier Part Number 1=XC3069CT-ND, Supplier 1=Digi-Key
Y3: library part "Crystal with Ground", "16MHz ±30ppm Crystal 18pF 80 Ohms 4-SMD, No Lead", Manufacturer="ECS Inc.", PartNumber=XC2866CT-ND, Supplier 1=Digi-Key, Supplier Part Number 1=XC2866CT-ND
Z1: library part "Zener - Bidirectional", "TVS DIODE 20VWM 36.8VC SMA", Manufacturer="Micro Commercial Co", PartNumber=SMA6J24CA-TP, Supplier Part Number 1=SMA6J24CA-TPMSCT-ND, Supplier 1=Digi-Key

## Free pads (board coordinates)
  round 220 hole 126: 0(1563,1564) 0(2665,1564) 0(2665,3690)

## Via types
v1: diameter 15, hole 9, Component Side to Solder Side, 290 vias
v2: diameter 20, hole 10, Component Side to Solder Side, 66 vias
v3: diameter 20, hole 13, Component Side to Solder Side, 12 vias
v4: diameter 50, hole 28, Component Side to Solder Side, 4 vias

## Nets (pads, with @x,y where several pads share a name; then routed paths per layer and width w, separated by ;. In a path a pad name is that pad's centre, name@x,y a point inside that pad or via, vN(x,y) a via of type N, cw(c..) or ccw(c..) an arc to the next point about the centre after c; other vN are vias at no path point)
3V3: C7.2 C8.2 C9.2 C13.2 C16.2 C18.2 C19.2 C20.2 C28.1 D8.1 I2C.4 J2.1 J3.2 JTAG/SWD.1 L1.2 P2.1 R1.1 R10.2 R16.2 R22.1 R32.2 R33.2 R34.1 SD1.4 SPI1.6 U3.6 U4.8 U5.5 U6.E5 U6.E6 U6.E7 U6.E8 U6.F5 U6.F8 U6.G1 U8.5 U9.5 U13.2 U13.4 U14.14 U15.8 UART1.4 | length 17924.8
  Component Side w10: U6.G1@1888.78,2092.48 1907.64,2111.34 1907.64,2138.01 1920.34,2150.71 2027.4,2150.71 U6.F5@2046.26,2131.85
  Component Side w12: I2C.4@1370,4185 1366,4185 1366,4064 1364,4062 1364,3770 1365,3769 1450,3769 1501,3718 1501,3302.4 D8.1@1510,3302.4 ; R10.2@1485,2644.53 1506.75,2666.28 ; v1(1524.94,2666.28) 1506.75,2666.28 ; v1(1533,1270) 1533,1341.27 J3.2@1548.7,1356.97 ; U8.5@1660.94,2995 1660.94,2984.5 1651,2984.5 1649.63,2983.13 1649.63,2952.87 1655,2947.5 C16.2@1655,2910.68 1516,2771.68 1516,2675.53 1506.75,2666.28 ; L1.2@1710.47,2104.53 C20.2@1770,2104.53 1809,2065.53 ; v1(1732,1663) 1735,1663 1737.4,1665.4 1750.3,1652.5 1769.01,1633.8 1809,1673.79 1809,2065.53 ; U5.5@1815,3155 1815,3075 1837,3053 2106.04,3053 2305.5,2853.54 2305.5,2753 ; U6.G1@1888.78,2092.48 1859.3,2063 1811.53,2063 1809,2065.53 ; C13.2@1920,2494.53 v1(1920,2523) ; v1(1920,2660) C28.1@2013.15,2660 ; v1(1967.52,1429.28) 1991.28,1429.28 2079.75,1340.81 SD1.4@2079.75,1034.8 ; U6.F5@2046.26,2131.85 U6.E5@2046.26,2171.22 U6.E6@2085.63,2171.22 U6.E7@2125,2171.22 U6.E8@2164.37,2171.22 U6.F8@2164.37,2131.85 ; 2171,2660 2313.21,2517.79 R16.2@2440.47,2517.79 2440.47,2453 2430.47,2443 R32.2@2430.47,2380 2430.47,2309 2444,2295.47 2444,2292.91 R33.2@2426.09,2275 2457.6,2243.49 C7.2@2457.6,2161.38 2472.98,2146 v1(2499.52,2146) ; v1(2390.28,1224.37) 2425.16,1224.37 C8.2@2450,1199.53 2471.26,1220.79 U14.14@2471.26,1287.91 ; U9.5@2505,1659.17 U9.5@2505,1660 ; C9.2@2509.37,1745.47 2509.37,1704.37 2505,1700 U9.5@2505,1660 ; JTAG/SWD.1@2813,3155 JTAG/SWD.1@2849.06,3155 ; U13.4@3018.15,3245.16 U13.4@3079.45,3245.16 U13.2@3079.45,3005 ; U4.8@3039.49,3790 3039.49,3843 3030.55,3851.94 C19.2@3030.55,3906.38 3003,3933.93 3003,3992 3004,3993 3068,3993 P2.1@3185,4110 3185,3976.03 U3.6@3195.43,3965.59 ; v1(3140,1986.65) J2.1@3184.02,1986.65 ; U9.5@2505,1660 2547,1702 2722.16,1702 2750.91,1673.25 2898.78,1673.25 R1.1@2925.53,1700 R22.1@2925.53,1760 2857.53,1828 2844,1828 2843,1829 2843,1878 2840,1881 U15.8@2785,1881 ; U15.8@2785,1881 2783.46,1881 2755.12,1908.12 C18.2@2728.25,1935 2750.25,1957 v1(2766,1957) 2785,1938 U15.8@2785,1881
  Component Side w20: C28.1@2013.15,2660 2171,2660 2212.5,2660 2305.5,2753 2308,2750.5 2643.5,2750.5 2810.5,2917.5 2810.5,3152.5 JTAG/SWD.1@2813,3155 ; JTAG/SWD.1@2849.06,3155 2927.99,3155 U13.4@3018.15,3245.16
  Signal Layer 2 w12: v1(1967.52,1429.28) 1990.66,1429.28 2058.06,1361.89 2058.06,1224.37
  Signal Layer 2 w15: I2C.4@1370,4185 1413,4142 1762,4142 UART1.4@1805,4185 1848,4142 ; v1(1524.94,2666.28) 1543.24,2647.97 1907.97,2647.97 v1(1920,2660) ; v1(1533,1270) 1542,1261 1666.72,1261 1682.22,1245.5 1704.7,1245.5 1725.83,1224.37 2058.06,1224.37 v1(2390.28,1224.37) ; v1(1732,1663) 1732,1525.72 1746.72,1511 1763.28,1511 1870.28,1618 v1(2122.5,1618) ; SPI1.6@2440,4185 2397,4142 1848,4142 ; v1(2499.52,2146) 2550.21,2146 2719.96,1976.25 2746.75,1976.25 v1(2766,1957) ; 3119,4051 2529,4051 2528.01,4051.99 1938.01,4051.99 1848,4142 ; v1(3140,1986.65) 2874.65,1986.65 ; P2.1@3185,4110 3119,4044 3119,3770.5 3137.5,3752 3189,3752 3210,3731 3210,3631.28 3158.72,3580 2962.5,3580 2917,3534.5 2917,3055.11 3122.3,2849.81 3122.3,2035.42 3110.58,2023.7 3094.02,2023.7 3086,2031.72 3086,1987 2875,1987 2874.65,1986.65 ; v1(2766,1957) 2766,1946 2767,1945 2785.09,1945 ; v1(2766,1957) 2784.09,1975.09 2784.09,1946 2785.09,1945 ; 2785.09,1945 2820.85,1945 ; 2820.85,1945 2833,1945 2874.65,1986.65 ; 2820.85,1945 2862.5,1986.65 2874.65,1986.65
  Signal Layer 1 w15: v1(1533,1270) 1533,1297.79 1732,1496.79 v1(1732,1663) ; v1(1920,2523) v1(1920,2660)
  Solder Side w12: v1(2122.5,1618) 2455.5,1951 2607.34,1951 2613.34,1957 v1(2766,1957)
  other v2: 2975,3075 3000,3075 3025,3075 3050,3075 3075,3075 3100,3075 3125,3075 3150,3075 3175,3075 3200,3075 2962.5,3100 2987.5,3100 3012.5,3100 3037.5,3100 3062.5,3100 3087.5,3100 3112.5,3100 3137.5,3100 3162.5,3100 3187.5,3100 2975,3125 3000,3125 3025,3125 3050,3125 3075,3125 3100,3125 3125,3125 3150,3125 3175,3125 3200,3125 2962.5,3150 2987.5,3150 3012.5,3150 3037.5,3150 3062.5,3150 3087.5,3150 3112.5,3150 3137.5,3150 3162.5,3150 3187.5,3150 2975,3175 3000,3175 3025,3175 3050,3175 3075,3175 3100,3175 3125,3175 3150,3175 3175,3175 3200,3175 2962.5,3200 2987.5,3200 3162.5,3200 3187.5,3200 2975,3225 3000,3225 3175,3225 3200,3225 2962.5,3250 2987.5,3250 3162.5,3250 3187.5,3250 2975,3275 3000,3275 3175,3275 3200,3275
5V0: C2.1 C4.1 C6.2 C12.2 D11.2 K1.7 L6.2 R4.1 U1.3 U5.3 U8.3 U9.3 U13.3 | length 8192
  Component Side w12: v1(1300.18,3325.37) 1301.8,3326.99 1329.59,3326.99 D11.2@1332.6,3330 1332.6,3372 1350,3389.4 K1.7@1350,3432.36 ; U1.3@1620,2075 1620,2000 1635,1985 C4.1@1710.47,1985 1710.47,1951.24 v1(1739.36,1922.35) ; U8.3@1680.63,3109.17 1680.63,3131.63 1692,3143 v1(1701,3143) ; U5.3@1834.69,3269.17 1834.69,3398.27 1894,3398.27 v1(1894,3128) ; v1(1957,3152.5) 1957,3103 1970,3090 C2.1@2013.15,3090 C2.1@2014,3090 ; v1(2457,1504.5) 2471.82,1504.5 2485.32,1518 U9.3@2485.32,1545 ; v1(2521.92,2866) 2520.76,2866 C12.2@2465,2810.24 2417,2810.24 2137.24,3090 C2.1@2014,3090 ; C6.2@2710,3865.47 L6.2@2645,3865.47 2518.47,3992 2401,3992 2288,3879 2288,3596 2014,3322 C2.1@2014,3090 ; v1(3042.32,2901.5) 3066.5,2901.5 U13.3@3170,3005 ; R4.1@3184.53,3630 3187,3627.53 v1(3187,3580)
  Signal Layer 2 w15: v1(2521.92,2866) 2562.92,2907 3036.82,2907 v1(3042.32,2901.5)
  Signal Layer 1 w15: U1.3@1620,2075 1670.47,2125.47 1670.47,2296.2 1676,2301.73 1676,2460.28 1717.19,2501.47 1717.19,2540.19 1736,2559 1736,3030 1750,3044 1848,3044 1956.5,3152.5 v1(1957,3152.5) ; v1(1701,3143) 1703.77,3145.77 1950.27,3145.77 v1(1957,3152.5) ; v1(1894,3128) 1918.5,3152.5 v1(1957,3152.5) ; v1(3042.32,2901.5) 2911,3032.82 2911,3538.5 2952.5,3580 v1(3187,3580)
  Solder Side w12: v1(1300.18,3325.37) 1300.18,3266.8 1280.47,3247.09 1280.47,3188.53 1287.5,3181.5 1662.5,3181.5 v1(1701,3143) ; v1(1739.36,1922.35) 1713.5,1896.49 1713.5,1641.89 1850.89,1504.5 2147.02,1504.5 2174.14,1477.38 2429.88,1477.38 v1(2457,1504.5)
A6: J1.1 R18.1 | length 1517
  Component Side w12: R18.1@2560,3330.03 v1(2560,3398.27)
  Signal Layer 2 w15: J1.1@1409.21,3824.09 1409.21,3616.5 1620.72,3405 2553.27,3405 v1(2560,3398.27)
A7: J1.11 TVS2.1 | length 798.2
  Component Side w12: TVS2.1@1065,3710 v1(1115.5,3710)
  Signal Layer 2 w15: v1(1115.5,3710) 1154.34,3710 1426.01,3981.67 1482.7,3981.67 1518.27,3946.1 1518.27,3925.71 1553.84,3890.14 1636.08,3890.14 J1.11@1681.85,3935.91
AGND: C17.1 C21.1 C23.1 C24.1 L5.2 R24.2 R28.2 U6.G6 U6.H6 | length 6526.1
  Component Side w12: C21.1@1130,1534.47 1130,1534.29 1187.34,1476.96 1202.66,1476.96 1248.5,1522.79 1248.5,1669 1342,1762.5 1342,2079 1579,2316 1661.79,2316 C23.1@1710.24,2267.56 ; v1(1710,2315) 1710.24,2314.76 C23.1@1710.24,2267.56 ; L5.2@1770,2269.53 1741.21,2269.53 1739,2267.32 C23.1@1710.47,2267.32 C23.1@1710.24,2267.56 ; v1(2066,2034) 2066.52,2034 U6.H6@2085.63,2053.11 U6.G6@2085.63,2092.48
  Component Side w15: v1(1130,3634) 1131.32,3634 R24.2@1161.32,3664 ; v1(1212.9,3555.57) 1248.4,3555.57 C17.1@1253.5,3550.47 ; v1(2397,3460) 2408.15,3471.15 2445.02,3471.15 R28.2@2446.4,3472.53 ; v1(2573,3901) 2573,3771.24 2542.5,3740.74 2542.5,3626.5 2663,3506 v1@2663,3412 ; C24.1@2618.79,3410 2661,3410 v1@2663,3412 ; v1(2665,3414) v1@2663,3412
  Signal Layer 2 w15: v1(1130,3634) 1134.47,3634 v1(1212.9,3555.57) ; v1(1435,2170.87) 1359.13,2170.87 1063.71,2466.29 1063.71,2578.71 1320.18,2835.18 1320.18,3451.33 1215.94,3555.57 v1(1212.9,3555.57) ; v1(1710,2315) 1737.07,2315 1836.5,2215.57 1836.5,2206.93 1906.93,2136.5 2050,2136.5 2066,2120.5 v1(2066,2034) ; v1(2573,3901) 2569,3905 2569,3909.12 2491.13,3986.99 2402.5,3986.99 2305.65,3890.14 2101.3,3890.14 2081.03,3869.86 1545.83,3869.86 1525.83,3889.86 1362.48,3889.86 1287.69,3815.07 1287.69,3630.36 v1(1212.9,3555.57)
  Solder Side w15: v1(2397,3460) 2619,3460 v1(2665,3414)
AREF: C21.2 R31.2 U6.G5 | length 1289.2
  Component Side w12: R31.2@1205,1593.53 C21.2@1130,1593.53 v1(1275,1738.53) ; v1(2028.33,2073) 2046.26,2090.93 U6.G5@2046.26,2092.48
  Signal Layer 2 w15: v1(1275,1738.53) 1448.86,1738.53 1476.84,1766.5 1541.78,1766.5 1598,1822.72 1598,1976.99 1691.94,2070.93 1825.6,2070.93 1827.66,2073 v1(2028.33,2073)
CAN0H: J1.13 U5.7 | length 1203
  Component Side w12: U5.7@1854.37,3155 1854.37,3102 1855.37,3101 1900,3101 1913,3114 1913,3278 2101,3466 2101,3642.5 2087.5,3656 1912.5,3656 1899.96,3668.54 J1.13@1899.96,3935.91
CAN0L: J1.12 U5.6 | length 1068
  Component Side w12: v1(1834.69,3108.5) U5.6@1834.69,3155
  Solder Side w12: J1.12@1790.91,3935.91 1790.91,3807.91 1731,3748 1731,3511 1938.5,3303.5 1938.5,3146.34 1898.66,3106.5 1836.69,3106.5 v1(1834.69,3108.5)
CAN0RX: U5.4 U6.J9 | length 1720.4
  Component Side w12: U5.4@1815,3269.17 v1(1815,3345) ; U6.J9@2203.74,2013.74 2222,1995.48 v1(2222,1995)
  Signal Layer 1 w15: v1(1815,3345) 1871.25,3345 2022,3194.25 2022,2760 2071.5,2710.5 2071.5,2348.97 2044,2321.47 2044,2111.97 2070,2085.97 2070,2080.43 2082.43,2068 2157.5,2068 2222,2003.5 v1(2222,1995)
CAN0TX: U5.1 U6.K9 | length 1664.7
  Component Side w10: v1(1857,3315) 1864,3315 1874.06,3304.94 U5.1@1874.06,3269.17
  Component Side w12: U6.K9@2203.74,1974.37 2223,1955.11 v1(2223,1954)
  Signal Layer 1 w10: v1(1857,3315) 2004.5,3167.5 2004.5,2690.77 2054,2641.27 2054,2356.22 2026.5,2328.72 2026.5,2104.72 2052.5,2078.72 2052.5,2073.18 2075.18,2050.5 2150.25,2050.5 2203.75,1997 2203.75,1974.36 2223,1955.11 v1(2223,1954)
CAN1H: J1.5 U8.7 | length 1384
  Component Side w12: v1(1700.31,2931) U8.7@1700.31,2995
  Solder Side w12: v1(1700.31,2931) 1866,2931 2171,3236 2171,3498.53 J1.5@1845.43,3824.09
CAN1L: J1.10 U8.6 | length 1064.3
  Component Side w12: J1.10@1572.8,3935.91 1572.8,3897 1583,3886.8 1583,3570 v1(1587,3566) ; v1@1677.78,2961.65 1680.61,2964.48 U8.6@1680.63,2995
  Signal Layer 1 w15: v1(1587,3566) 1587,3047.13 v1@1678,2956.13 ; v1(1678,2962) v1@1678,2956.13 ; v1@1678.37,2955.76 v1@1678,2956.13
CAN1RX: U6.K5 U8.4 | length 1794.2
  Component Side w12: v1(1658.94,3138) 1660.94,3136 U8.4@1660.94,3109.17 ; v1(2027,1955) 2027,1955.11 U6.K5@2046.26,1974.37
  Signal Layer 1 w15: v1(1658.94,3138) 1627.5,3169.44 1627.5,3223 1628.69,3224.19 1716.81,3224.19 1773.91,3167.09 1904.8,3167.09 1910.22,3172.5 1965.28,3172.5 1977,3160.78 1977,2648.5 2036.5,2589 2036.5,2369.89 2008,2341.39 2008,2091.28 1998,2081.28 1998,1984 v1(2027,1955)
CAN1TX: U6.M4 U8.1 | length 1997.9
  Component Side w12: v1(1630,3119) 1630,3137.5 1654.5,3162 1719,3162 1720,3161 U8.1@1720,3109.17 ; U6.M4@2006.89,1895.63 2006.89,1862.57 2013.15,1856.31 v1(2013.15,1855.5)
  Solder Side w12: v1(1630,3119) 1630,3016.97 1587.75,2974.72 1587.75,2834.85 1562,2809.1 1562,2004 1589,1977 1710.87,1977 1757.86,1930.02 1757.86,1914.69 1736.5,1893.33 1736.5,1827.34 1754.34,1809.5 1967.15,1809.5 v1(2013.15,1855.5)
CAN2H: J1.3 K1.3 U9.7 | length 2755.5
  Component Side w12: v1(1750,3597) K1.3@1750,3680 ; v1(2403,2191.5) 2411.1,2183.4 2411.1,1925.67 2403,1917.57 2403,1778 2446,1777 2465.63,1757.37 U9.7@2465.63,1659.17
  Signal Layer 1 w15: J1.3@1627.32,3824.09 1627.32,3730.68 1750,3608 v1(1750,3597) ; v1(2122,3235) 2399,2958 2399,2195.5 v1(2403,2191.5)
  Solder Side w12: v1(1750,3597) 1971,3597 2122,3446 v1(2122,3235)
CAN2H/J1708+: J1.15 K1.1 | length 965
  Component Side w12: v1(1650,3608) K1.1@1650,3680
  Solder Side w12: v1(1650,3608) 1672,3630 1672,3845 1637,3880 1637,3971 1650,3984 2069.98,3984 J1.15@2118.07,3935.91
CAN2L: J1.4 K1.6 U9.6 | length 3930.1
  Component Side w12: J1.4@1736.38,3824.09 1736.38,3763 1713,3739.62 1713,3574 1750,3537 K1.6@1750,3432.36 ; U9.6@2485.32,1659.17 v1(2485.32,1709)
  Signal Layer 2 w15: J1.4@1736.38,3824.09 1787.47,3773 2491.12,3773 2564.12,3846 v1(2755,3846)
  Signal Layer 1 w15: v1(2485.32,1709) 2623,1709 2786,1872 2786,1971 2767,1990 2767,2167.57 2766.57,2168 2766.57,2345.57 2813,2392 2813,3727.21 2755,3785.21 v1(2755,3846)
CAN2L/J1708-: J1.14 K1.4 | length 1353.7
  Component Side w12: K1.4@1650,3432.36 1650,3516 1689,3555 1689,3877 1746.64,3934.64 1746.64,4195.64 1777,4226 1984,4226 1985,4225 1985,3959.92 J1.14@2009.02,3935.91
CAN2RX: U9.4 U14.2 | length 552
  Component Side w10: v1(2589.37,1192) 2589.37,1233.5 2620,1264.13 2620,1305.63 2612.85,1312.78 2590.09,1312.78 U14.2@2589.37,1313.5
  Component Side w12: v1(2505,1517) U9.4@2505,1545
  Signal Layer 1 w15: v1(2505,1517) 2594.05,1427.94 2594.05,1196.68 v1(2589.37,1192)
CAN2TX: U9.1 U14.1 | length 1200.9
  Component Side w12: v1(2410,1568) 2421,1557 2445.94,1557 U9.1@2445.94,1545 ; v1(2574.05,1244.06) 2574,1244.11 2574,1272.54 U14.1@2589.37,1287.91
  Solder Side w12: v1(2410,1568) 2412.5,1568 2425,1580.5 2425,1633.5 2437.5,1646 2512,1646 2596.5,1730.5 2746.66,1730.5 2760,1717.16 2760,1666 2785.35,1640.65 2785.35,1614.77 2786,1614.12 2786,1332 2698.05,1244.06 v1(2574.05,1244.06)
D01: SPI1.4 U6.E9 U11.17 | length 2563.3
  Component Side w12: U6.E9@2203.74,2171.22 2221.52,2189 v1(2223,2189) ; v1(2480,2237.79) U11.17@2581.04,2237.79
  Signal Layer 1 w15: SPI1.4@2240,4185 2240,3501.5 2505,3236.5 2505,2877.37 2460,2832.37 2460,2257.79 v1(2480,2237.79)
  Solder Side w12: v1(2223,2189) 2223,2182.48 2222.26,2181.74 2251,2153 2462.5,2153 2480,2170.5 v1(2480,2237.79)
D02: Q1.1 R14.2 U6.A5 | length 1627.7
  Component Side w12: Q1.1@1664.29,3254.1 1690,3254.1 ; R14.2@1735,3274.53 1714.57,3254.1 1690,3254.1 ; U6.A5@2046.26,2328.7 2046.26,2439.32 1901,2584.58 1901,2687 1947,2733 2100,2733 2116,2749 2116,3019 2099,3036 1757,3036 1743,3050 1743,3173.86 1722.5,3179 1701.5,3200 1701.5,3242.6 1690,3254.1
D05: D4.1 U6.A1 | length 3422.5
  Component Side w12: v1(1864,2392) 1864,2353.48 U6.A1@1888.78,2328.7 ; D4.1@2620.4,1105 2630.4,1095 v1(2664,1095)
  Signal Layer 1 w15: v1(1864,2392) 1864,2433 v1(1896,2465) ; v1(2664,1095) 2664,1191 2667,1194 2667,1375 2894.5,1602.5 2894.5,1941.5 2977,2024 v1(2977,2676)
  Solder Side w12: v1(1896,2465) 1896,2675 2154,2933 2720,2933 v1(2977,2676)
D06: D1.1 U6.A4 | length 2047.4
  Component Side w12: D1.1@1475.4,1105 v1(1521,1105) ; U6.A4@2006.89,2328.7 2016.5,2338.31 v1(2016.5,2437.5)
  Signal Layer 1 w15: v1(1521,1105) 1521,1253.72 1513,1261.72 1513,1286.72 1440,1359.72 1440,1831.75 1690.47,2082.22 1690.47,2187.04 1737.5,2234.07 1737.5,2508.5 1762,2533 1875,2533 1970.5,2437.5 v1(2016.5,2437.5)
D07: R10.1 U6.C4 U7.1 | length 670.9
  Component Side w12: R10.1@1485,2585.47 1529.96,2540.51 U7.1@1570,2540.51 1570,2525 v1(1595,2525) ; v1(1988,2269) 1988,2267.3 2005.34,2249.96 U6.C4@2006.89,2249.96
  Signal Layer 2 w15: v1(1595,2525) 1851,2269 v1(1988,2269)
D08: U6.B4 U7.4 | length 469.7
  Component Side w12: v1(1717.19,2472.5) 1720,2475.31 U7.4@1720,2540.51 ; U6.B4@2006.89,2289.33 2004.56,2289.33 v1@1987.89,2306 ; v1@1987.89,2306 v1@1988,2306.11 ; v1@1987.89,2306 v1@1988,2306.11 ; v1@1988,2306.11 v1(1988,2307.34) v1@1988,2306.11
  Signal Layer 2 w15: v1(1717.19,2472.5) 1764.93,2424.77 1926.23,2424.77 1945.5,2405.5 1945.5,2349.84 v1(1988,2307.34)
D09: U4.1 U6.A11 U6.B11 | length 2045.2
  Component Side w12: U6.B11@2282.48,2289.33 U6.A11@2282.48,2328.7 2341,2387.22 v1(2341,2465) ; v1(2813,3824.09) 2813,3797 2820,3790 U4.1@2850.51,3790
  Signal Layer 1 w15: v1(2813,3824.09) 2813,3791 2854,3750 v1(2854,2655)
  Solder Side w12: v1(2341,2465) 2531,2655 v1(2854,2655)
D10: U3.2 U6.A9 | length 2325.5
  Component Side w12: U6.A9@2203.74,2328.7 v1(2269.04,2394) ; v1(3099,3940) U3.2@3124.57,3940
  Signal Layer 1 w15: v1(2929,2618) 2888,2659 2888,3729 v1(3099,3940)
  Solder Side w12: v1(2269.04,2394) 2537,2394 2581,2438 2581,2486.5 2712.5,2618 v1(2929,2618)
D11: U6.C8 U14.11 | length 1678.5
  Component Side w12: U6.C8@2164.37,2249.96 v1@2183.11,2268.74 ; v1(2429,1359) 2452.31,1359 2458,1364.69 U14.11@2471.26,1364.69
  Signal Layer 2 w15: v1(2183.11,2268.78) 2183.11,2259.14 2203,2239.24 2203,2155.34 2245.34,2113 2381,2113 2510.5,1983.5 2606.5,1983.5 2759,1831 2759,1703.72 2741.78,1686.5 2550,1686.5 2531,1667.5 2531,1562.5 2517.5,1549 2436,1549 2397,1510 2397,1409.57 2413.71,1392.86 2413.71,1374.29 v1(2429,1359)
D12: U6.B8 U14.12 | length 1865.8
  Component Side w12: U6.B8@2164.37,2289.33 2164.37,2289.75 v1(2183,2308.38) ; v1(2417,1323) 2418.34,1323 2423.73,1317.6 2445.56,1339.44 2470.92,1339.44 U14.12@2471.26,1339.1
  Signal Layer 1 w15: v1(2183,2191) 2183,2240.39 2203.11,2260.5 2203.11,2277.06 2183,2297.17 v1(2183,2308.38)
  Solder Side w12: v1(2183,2191) 2124,2132 2124,1946.84 2117.85,1940.69 2117.85,1777.85 2087,1747 2087,1603.3 2134.8,1555.5 2326.9,1555.5 2332.9,1549.5 2525,1549.5 2544,1530.5 2544,1495.45 2625,1414.45 2625,1317.62 2571.88,1264.5 2479.55,1264.5 2469.87,1274.18 2469.87,1315.13 2467.4,1317.6 2462,1323 v1(2417,1323)
D13: U6.D8 U14.10 | length 1638.1
  Component Side w12: v1(2144.78,2191) U6.D8@2164.37,2210.59 ; v1(2392.36,1385.93) 2397.44,1380.85 2444.85,1380.85 2454.28,1390.28 U14.10@2471.26,1390.28
  Solder Side w12: v1(2144.78,2191) 2070,2191 2051.39,2209.61 1979.34,2209.61 1968.5,2198.77 1968.5,2158.5 2006.5,2120.5 2006.5,2087.66 1999.5,2080.66 1999.5,2065.34 2007,2057.84 2007,2030.34 2023.34,2014 2045.75,2014 2046.75,2013 2046.75,1872.1 2048.65,1870.2 2048.65,1565.19 2075.34,1538.5 2316.79,1538.5 2322.79,1532.5 2461.06,1532.5 2476,1517.56 2476,1412 2444.85,1380.85 2397.44,1380.85 v1(2392.36,1385.93)
D14: D2.1 SPI1.2 U6.D4 | length 4253
  Component Side w12: D2.1@1680.4,1105 1695.5,1105 1790.5,1200 v1(1831,1200) ; v1(1987,2230) 1987.48,2230 U6.D4@2006.89,2210.59
  Signal Layer 1 w15: v1(1831,1200) 1831,1522.27 1761.21,1592.06 1761.21,1662.08 1640.5,1782.78 1640.5,2003.97 1723.31,2086.78 1723.31,2129.87 1730.47,2137.03 1730.47,2163.28 1730,2163.76 1730,2198.28 1781.99,2250.28 1966.72,2250.28 v1(1987,2230) ; SPI1.2@2040,4185 2219,4006 2219,3242 2439,3022 v1(2439,2233.56)
  Solder Side w12: v1(1987,2230) 2039.84,2230 2096.34,2286.5 2112.39,2286.5 2151.56,2247.33 2190.17,2247.33 2227.5,2210 2415.44,2210 v1(2439,2233.56)
D15: R32.1 U6.B12 U14.13 | length 1843.6
  Component Side w12: U6.B12@2321.85,2289.33 v1(2341.52,2309) ; v1(2397.44,1285.25) 2433.45,1285.25 2461.71,1313.5 U14.13@2471.26,1313.5 ; v1(2489.53,2311) v1(2489.53,2351.75) R32.1@2489.53,2380
  Signal Layer 2 w15: v1(2341.52,2309) 2446.77,2309 v1(2489.53,2351.75)
  Signal Layer 1 w15: v1(2397.44,1285.25) 2419.1,1285.25 2485,1351.15 2485,1528 2542,1585 2542,1666.5 2562.5,1687 2674,1687 2832.57,1845.57 2832.57,2040.7 2810.5,2062.77 v1(2810.5,2088.16)
  Solder Side w12: v1(2489.53,2311) 2687,2113.53 2687,2093 2688,2092 2806.66,2092 v1(2810.5,2088.16)
D16: R9.1 U6.H10 U7.2 | length 905.8
  Component Side w12: U7.2@1620,2540.51 1620,2485.47 1614.53,2480 R9.1@1614.53,2426.61 v1(1651,2426.61) ; v1(2223.43,2075) 2223.43,2072.79 U6.H10@2243.11,2053.11
  Signal Layer 2 w15: v1(1651,2426.61) 1653.74,2426.61 1856.5,2223.85 1856.5,2215.22 1910.22,2161.5 2099,2161.5 2185.5,2075 v1(2223.43,2075)
D17: R8.1 U6.H9 U7.3 | length 1002.7
  Component Side w12: U7.3@1670,2540.51 U7.3@1670,2520 ; R8.1@1680.95,2426.39 1680.95,2477 1670,2487.95 U7.3@1670,2520 ; v1(1693,2520) U7.3@1670,2520 ; U6.H9@2203.74,2053.11 2203.74,2051.56 v1(2222.71,2032.6)
  Signal Layer 2 w15: v1(1693,2520) 1699.49,2520 1774.72,2444.77 1934.52,2444.77 1965.5,2413.78 1965.5,2396.75 2084,2278.25 2084,2223.5 2138.14,2169.36 2157.35,2169.36 2243.43,2083.28 2243.43,2053.31 v1(2222.71,2032.6)
D18: I2C.3 R1.2 U6.G11 U15.5 | length 3438.5
  Component Side w12: U6.G11@2282.48,2092.48 2282.58,2092.48 2302.17,2072.88 v1(2302.27,2072.88) ; v1(2739,1712) 2739,1728.53 2738,1729.53 U15.5@2785.39,1729.53 2836.95,1729.53 R1.2@2866.47,1700